# Altium PCB PCB.PcbDoc (part 1 of 3)
Units mm, origin at the board's own origin, x right, y up, seen from the top; angles counter-clockwise.
Board outline 68.58 x 53.34 mm, 4 copper layers (TOP, INNER1, INNER2, BOTTOM), stack 1.586 mm thick; 94 components, 161 nets, 536 pads, 304 vias.
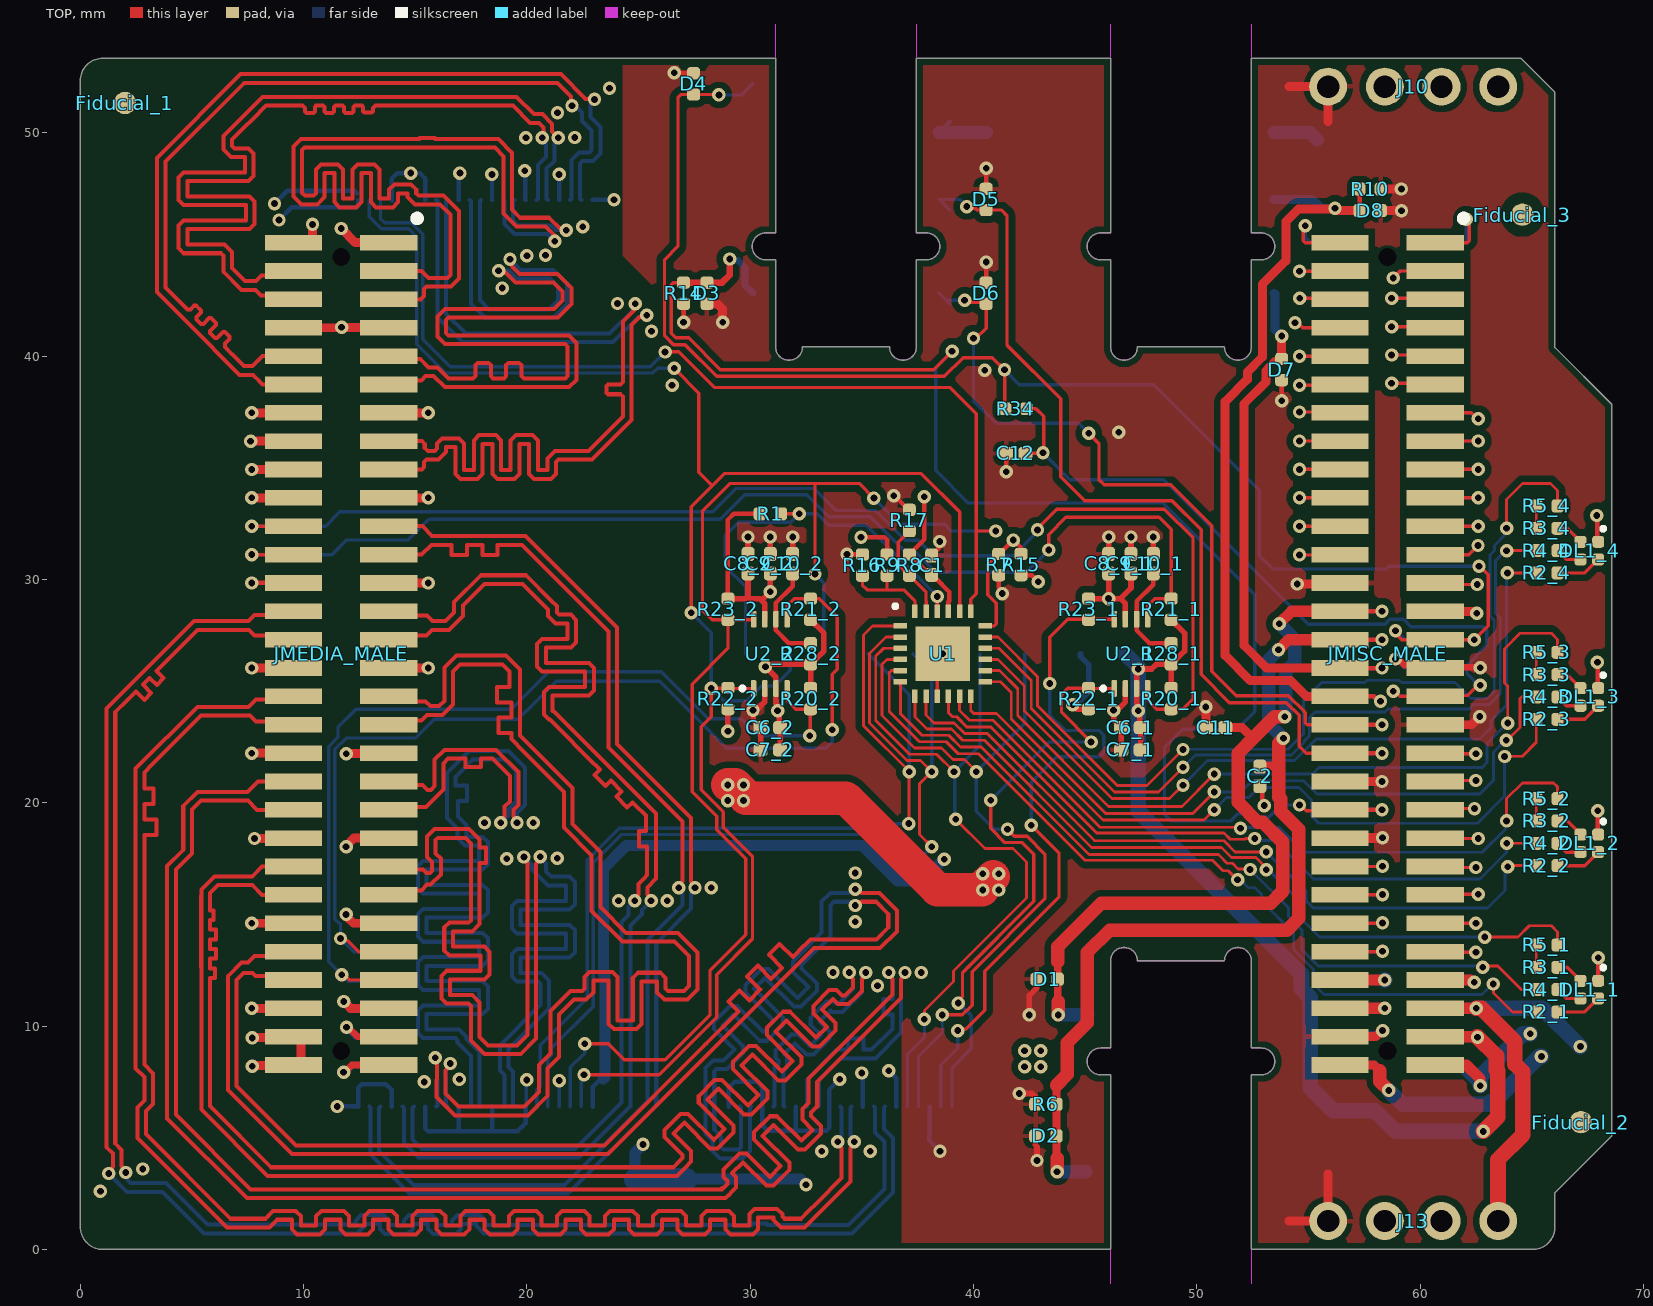
[diagram p0: TOP view]
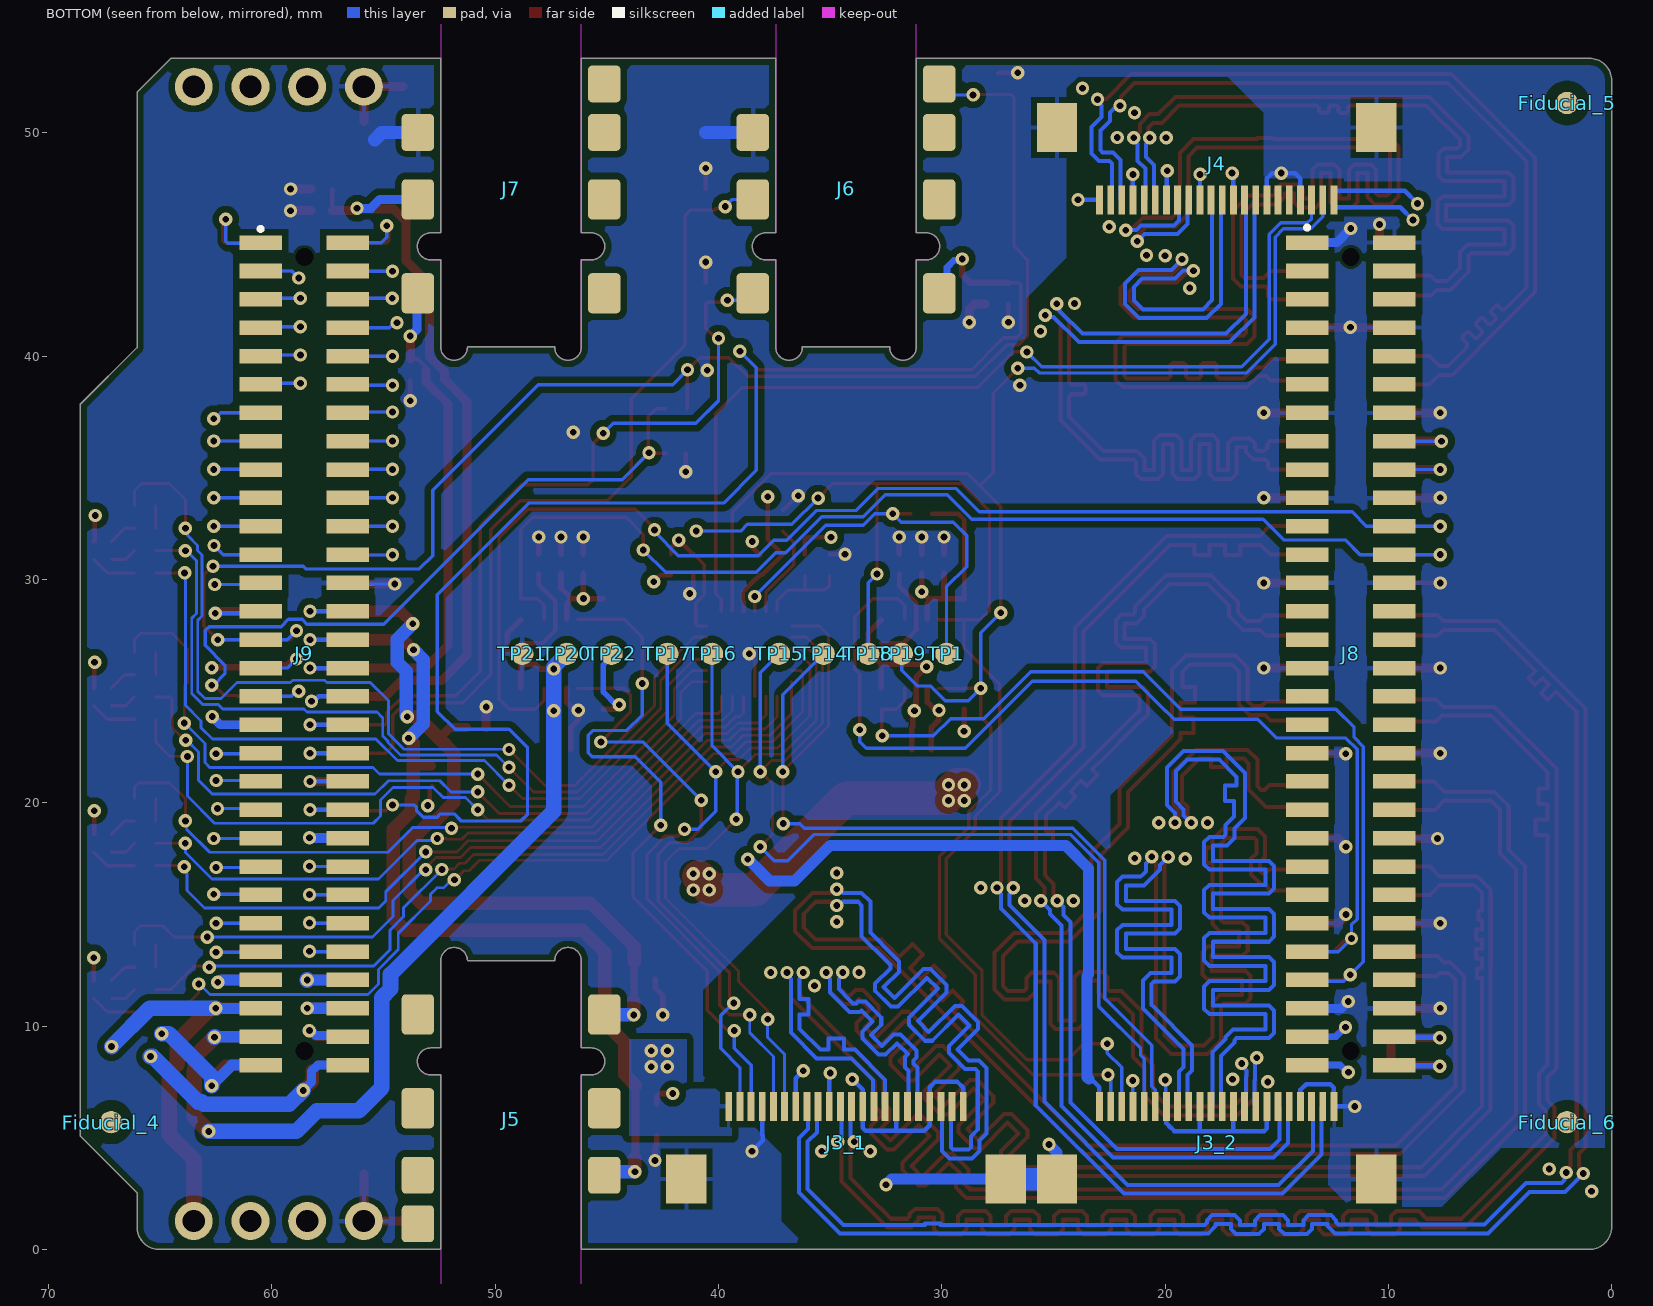
[diagram p1: BOTTOM view, seen from below]
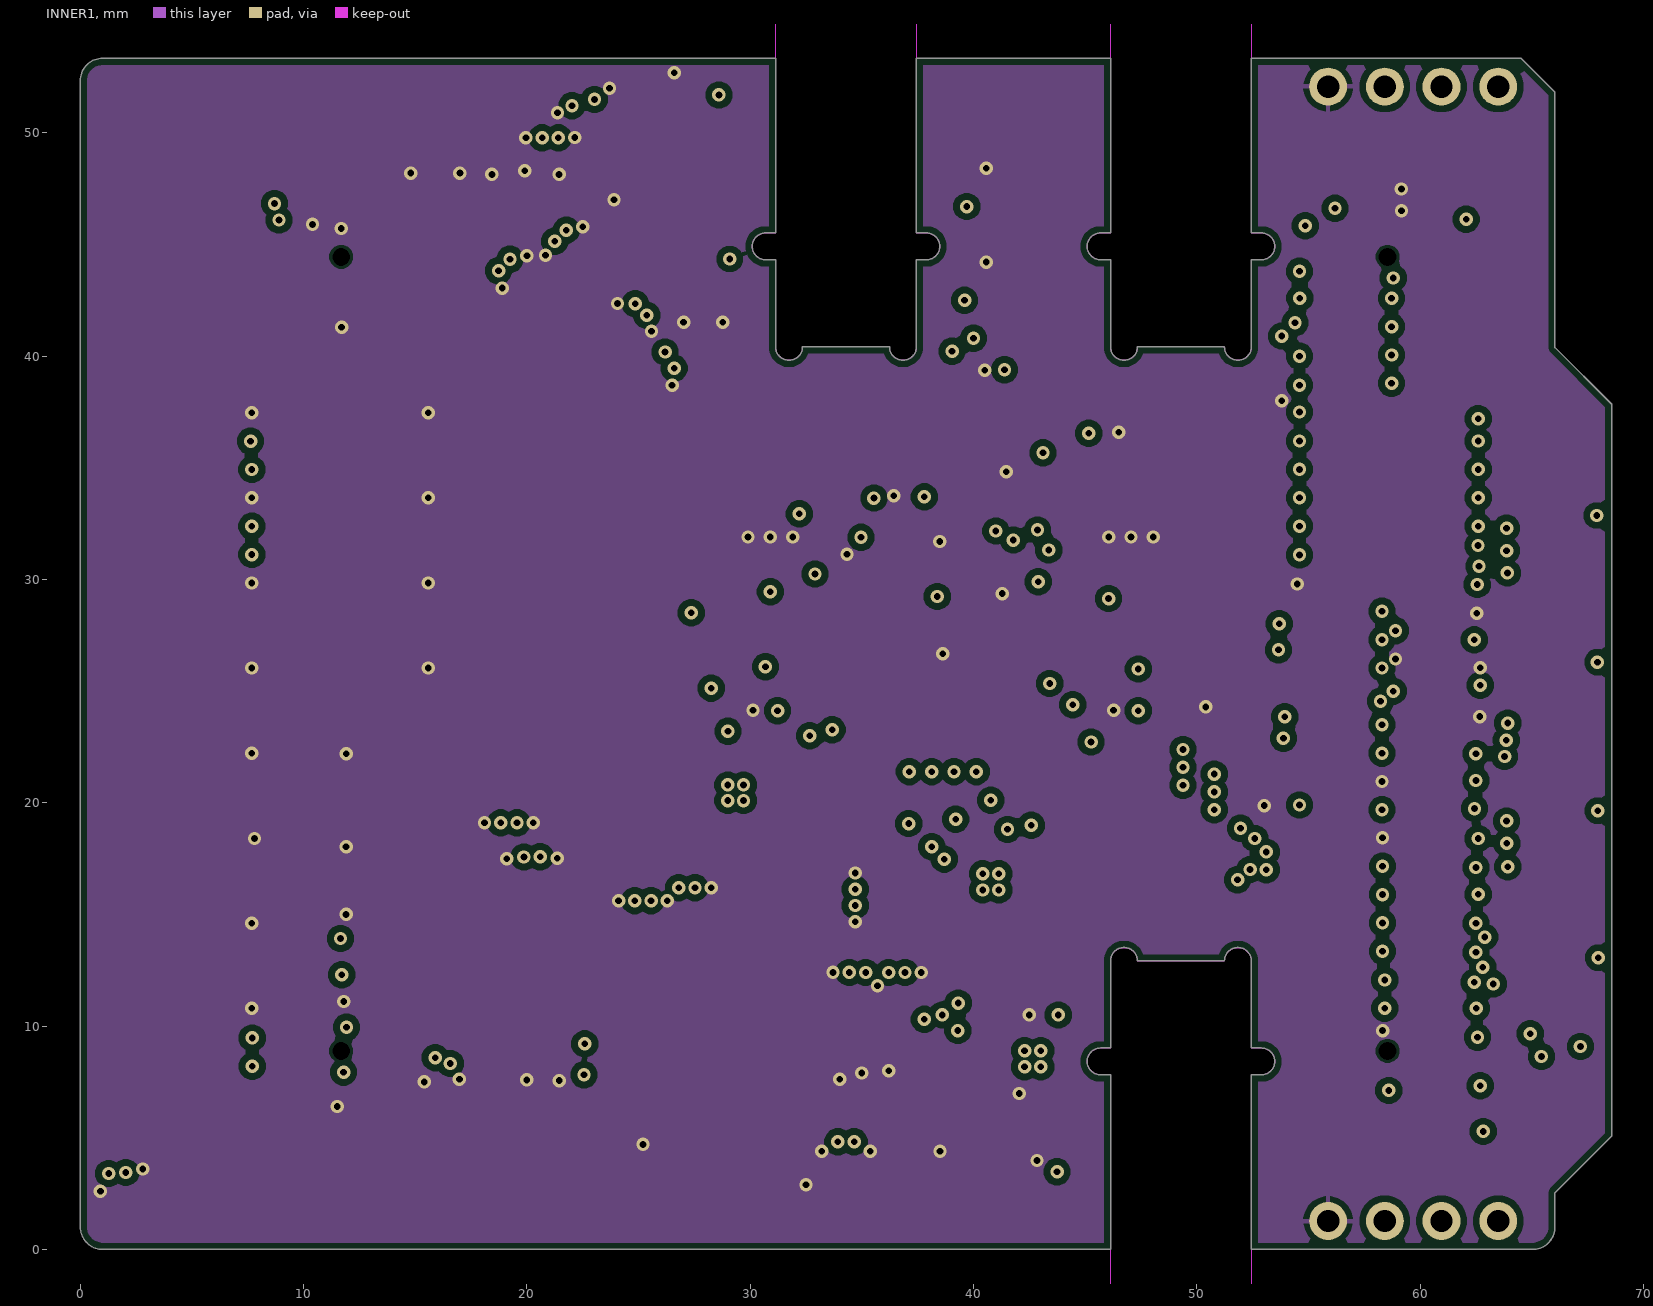
[diagram p2: INNER1]
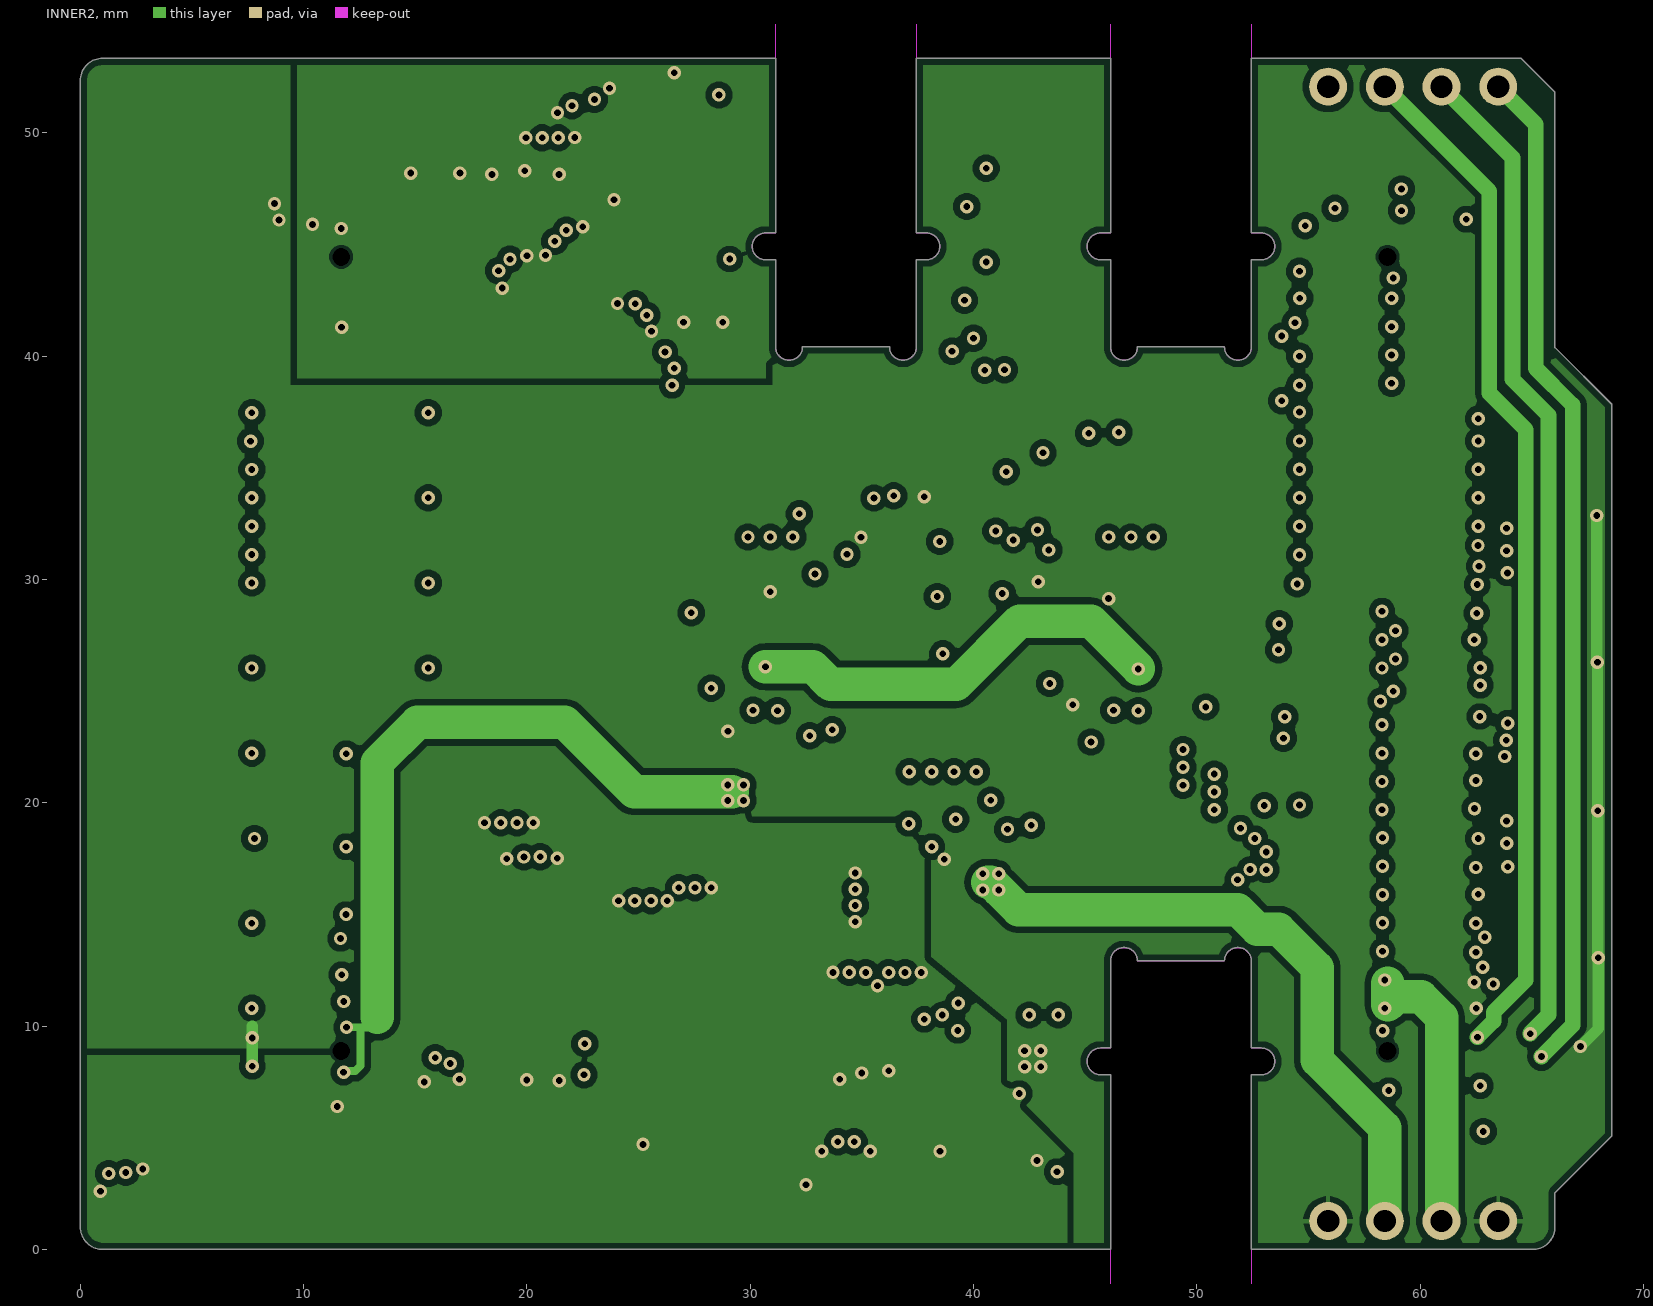
[diagram p3: INNER2]
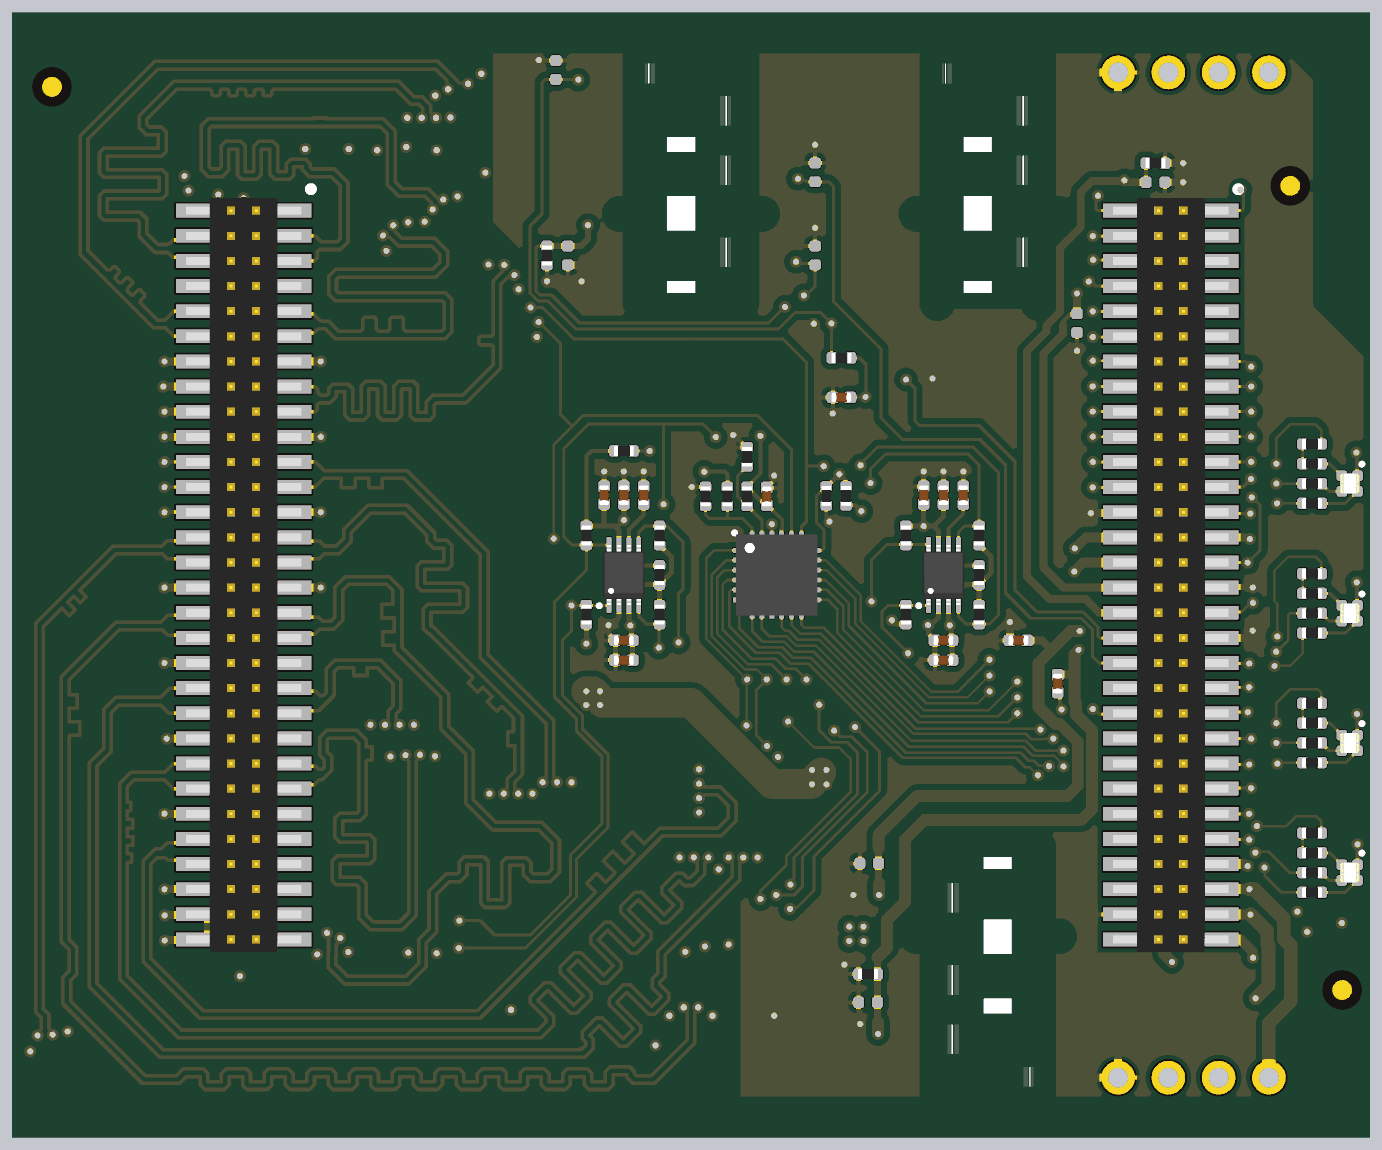
[diagram p6: 3D render of the assembled board from above, using the file's embedded part models]
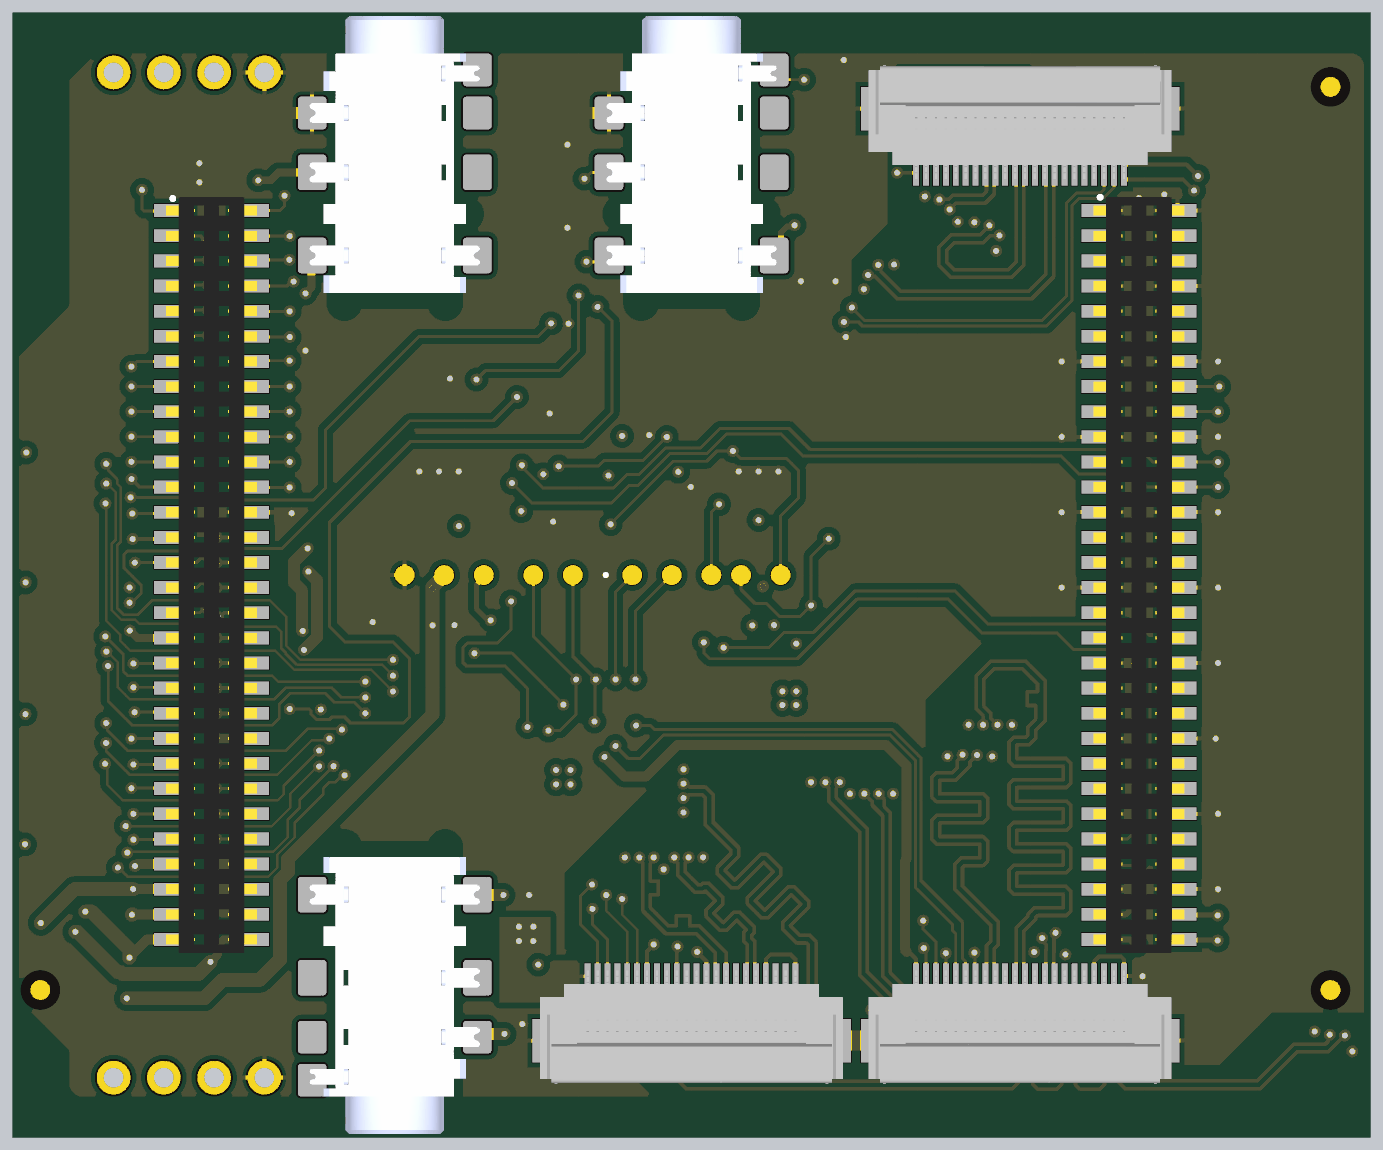
[diagram p7: 3D render of the assembled board from below, using the file's embedded part models]

## Layer stack, top to bottom
Top Solder: solder mask 0.0254, SM-003, Dk 4
TOP: signal copper 0.018
Dielectric 1: prepreg 0.14, PP-014, Dk 4.2
INNER1: signal copper 0.035
Dielectric2: core 1.2, FR-4, Dk 4.8
INNER2: signal copper 0.035
Dielectric3: prepreg 0.14, PP-014, Dk 4.2
BOTTOM: signal copper 0.018
Bottom Solder: solder mask 0.0254, SM-003, Dk 4

## Board outline
0,1 ccw(c1,1) 1,0 46.14,0 46.14,7.82 45.69,7.82 cw(c45.69,8.42) 45.69,9.02 46.14,9.02 46.14,12.92 cw(c46.74,12.92) 47.34,12.92 51.24,12.92 cw(c51.84,12.92) 52.44,12.92 52.44,9.02 52.89,9.02 cw(c52.89,8.42) 52.89,7.82 52.44,7.82 52.44,0 65.04,0 ccw(c65.04,1) 66.04,1 66.04,2.54 68.58,5.08 68.58,37.846 66.04,40.386 66.04,51.816 64.516,53.34 52.44,53.34 52.44,45.52 52.89,45.52 cw(c52.89,44.92) 52.89,44.32 52.44,44.32 52.44,40.42 cw(c51.84,40.42) 51.24,40.42 47.34,40.42 cw(c46.74,40.42) 46.14,40.42 46.14,44.32 45.69,44.32 cw(c45.69,44.92) 45.69,45.52 46.14,45.52 46.14,53.34 37.44,53.34 37.44,45.52 37.89,45.52 cw(c37.89,44.92) 37.89,44.32 37.44,44.32 37.44,40.42 cw(c36.84,40.42) 36.24,40.42 32.34,40.42 cw(c31.74,40.42) 31.14,40.42 31.14,44.32 30.69,44.32 cw(c30.69,44.92) 30.69,45.52 31.14,45.52 31.14,53.34 1,53.34 ccw(c1,52.34) 0,52.34

## Design rules (kind name [scope] priority, off if disabled: settings)
BoardOutlineClearance Silks [(OnLayer('Top Overlay') OR OnLayer('Bottom Overlay'))] p1: gap=0 ignorepadtopadclearanceinfootprint=FALSE
BoardOutlineClearance [All] p2: gap=0.3 ignorepadtopadclearanceinfootprint=FALSE
Clearance Clearance_differential_CSI0 [InDifferentialPair('CSI0_D0') OR InDifferentialPair('CSI0_D1') vs InNetClass('IMPEDANCE_100R')] p1: gap=0.127 ignorepadtopadclearanceinfootprint=FALSE
Clearance Clearance_differential [InNetClass('IMPEDANCE_100R') vs InNetClass('IMPEDANCE_100R')] p2: gap=0.4 ignorepadtopadclearanceinfootprint=FALSE
Clearance COPPER_0.3mm [All] p3: gap=0.127 ignorepadtopadclearanceinfootprint=FALSE except(0.3: Arc-Fill Arc-Poly Arc-Region Track-Fill Track-Poly Track-Region SMDPad-Fill SMDPad-Poly SMDPad-Region THPad-Fill THPad-Poly THPad-Region Via-Fill Via-Poly Via-Region Fill-Fill Fill-Poly Fill-Region Poly-Poly Poly-Region Region-Region)
Clearance "Generic clearance 0.127mm" [All] p4: gap=0.127 ignorepadtopadclearanceinfootprint=FALSE
ComponentClearance [All] p1: gap=0.2 collisioncheckmode=3 verticalgap=0 showdistances=TRUE
DiffPairsRouting DSI_diffpairrouting [InDifferentialPairClass('DSI')] p1: maxlimit=0.36 minlimit=0.21 mostfreqgap=0.36 toplayer_maxgap=0.21 toplayer_prefgap=0.21 toplayer_minwidth=0.18 toplayer_maxwidth=0.18 toplayer_prefwidth=0.18 bottomlayer_maxgap=0.21 bottomlayer_prefgap=0.21 bottomlayer_minwidth=0.18 bottomlayer_maxwidth=0.18 bottomlayer_prefwidth=0.18 impedanceprofiledriven=TRUE impedanceprofileid={F22B831B-72FA-4BC6-B015-EECE9AC290C8} impedanceprofilevalue=100.000000 maxuncoupledlength=12.7
DiffPairsRouting CSI0_diffpairrouting [InDifferentialPairClass('CSI0')] p2: maxlimit=0.36 minlimit=0.21 mostfreqgap=0.36 toplayer_maxgap=0.21 toplayer_prefgap=0.21 toplayer_minwidth=0.18 toplayer_maxwidth=0.18 toplayer_prefwidth=0.18 bottomlayer_maxgap=0.21 bottomlayer_prefgap=0.21 bottomlayer_minwidth=0.18 bottomlayer_maxwidth=0.18 bottomlayer_prefwidth=0.18 impedanceprofiledriven=TRUE impedanceprofileid={F22B831B-72FA-4BC6-B015-EECE9AC290C8} impedanceprofilevalue=100.000000 maxuncoupledlength=12.7
DiffPairsRouting CSI1_diffpairrouting [InDifferentialPairClass('CSI1')] p3: maxlimit=0.36 minlimit=0.21 mostfreqgap=0.36 toplayer_maxgap=0.21 toplayer_prefgap=0.21 toplayer_minwidth=0.18 toplayer_maxwidth=0.18 toplayer_prefwidth=0.18 bottomlayer_maxgap=0.21 bottomlayer_prefgap=0.21 bottomlayer_minwidth=0.18 bottomlayer_maxwidth=0.18 bottomlayer_prefwidth=0.18 impedanceprofiledriven=TRUE impedanceprofileid={F22B831B-72FA-4BC6-B015-EECE9AC290C8} impedanceprofilevalue=100.000000 maxuncoupledlength=12.7
Height [All] p1: minheight=0 maxheight=30 prefheight=12.7
HoleSize [All] p1: absolutevalues=TRUE maxlimit=30 minlimit=0.3 maxpercent=80.000 minpercent=20.000
HoleToHoleClearance [All] p1: gap=0.25 allowstackedmicrovias=FALSE
MatchedLengths DSI_delay_pairs [InDifferentialPairClass('DSI')] p1: tolerance=0.15 checknetsindiffpair=TRUE checkdiffpairvsdiffpair=FALSE checkxsignals=FALSE checkothers=FALSE
MatchedLengths CSI0_delay_pairs [InDifferentialPairClass('CSI0')] p2: tolerance=0.15 checknetsindiffpair=TRUE checkdiffpairvsdiffpair=FALSE checkxsignals=FALSE checkothers=FALSE
MatchedLengths CSI1_delay_pairs [InDifferentialPairClass('CSI1')] p3: tolerance=0.15 checknetsindiffpair=TRUE checkdiffpairvsdiffpair=FALSE checkxsignals=FALSE checkothers=FALSE
MatchedLengths DSI_delay_group [InDifferentialPairClass('DSI')] p4: tolerance=0.5 checknetsindiffpair=FALSE checkdiffpairvsdiffpair=TRUE checkxsignals=TRUE checkothers=TRUE
MatchedLengths CSI0_delay_group [InDifferentialPairClass('CSI0')] p5: tolerance=0.5 checknetsindiffpair=FALSE checkdiffpairvsdiffpair=TRUE checkxsignals=TRUE checkothers=TRUE
MatchedLengths CSI1_delay_group [InDifferentialPairClass('CSI1')] p6: tolerance=0.5 checknetsindiffpair=FALSE checkdiffpairvsdiffpair=TRUE checkxsignals=TRUE checkothers=TRUE
MinimumAnnularRing [All] p1: minimumring=0.15
PlaneConnect [All] p1: pad.planeconnectstyle=Relief pad.reliefexpansion=0.508 pad.reliefentries=4 pad.reliefconductorwidth=0.254 pad.reliefairgap=0.254 via.planeconnectstyle=Direct via.reliefexpansion=0.508 via.reliefentries=4 via.reliefconductorwidth=0.254 via.reliefairgap=0.254
PolygonConnect QR_POLY [(ObjectKind = 'Pad') And (Name = 'QR1-PAD')] p1: connectstyle=Direct reliefconductorwidth=0.254 reliefentries=4 polygonreliefangle="90 Angle" airgapwidth=0.254
PolygonConnect [All] p2: thpad.connectstyle=Relief thpad.reliefconductorwidth=0.2 thpad.reliefentries=4 thpad.polygonreliefangle="90 Angle" thpad.airgapwidth=0.254 smdpad.connectstyle=Relief smdpad.reliefconductorwidth=0.2 smdpad.reliefentries=4 smdpad.polygonreliefangle="90 Angle" smdpad.airgapwidth=0.254 via.connectstyle=Direct via.reliefconductorwidth=0.254 via.reliefentries=4 via.polygonreliefangle="90 Angle" via.airgapwidth=0.254
ReturnPath ReturnPath_100R [InNetClass('IMPEDANCE_100R')] p1: impedanceprofileid={F22B831B-72FA-4BC6-B015-EECE9AC290C8} _gaplimit=0.2 _useantipads=TRUE maxstitchviadistance=1.5
RoutingVias StandardVias [All] p1: holewidth=0.3 width=0.6 viastyle="Through Hole" minholewidth=0.3 minwidth=0.6 maxholewidth=0.3 maxwidth=0.6
SMDToCorner [All] p1: distance=39370
SilkToSilkClearance [All] p1: silktosilkclearance=0.2
SilkToSolderMaskClearance [IsPad] p1: minsilkscreentomaskgap=0.15 clearancetoexposedcopper=TRUE
SolderMaskExpansion VIAtented [IsVia] p1: expansion=0.102 istentingtop=TRUE
SolderMaskExpansion [All] p2: expansion=0.05 istentingtop=FALSE
SupplyNets "Schematic Supply Nets_2" [InNet('GND')] p1: voltage=0.000
SupplyNets "Schematic Supply Nets_4" [InNet('+5V')] p2: voltage=0.000
SupplyNets "Schematic Supply Nets_6" [InNet('PWR_3P3V')] p3: voltage=0.000
SupplyNets "Schematic Supply Nets_1" [InNet('DC_IN')] p4: voltage=0.000
SupplyNets "Schematic Supply Nets" [InNet('VCC_PX3_1P8')] p5: voltage=0.000
SupplyNets "Schematic Supply Nets_7" [InNet('VCOIN')] p6: voltage=0.000
SupplyNets "Schematic Supply Nets_3" [InNet('VBAT')] p7: voltage=0.000
UnConnectedPin [All] p1:
UnRoutedNet [All] p1: checkbadconnections=TRUE
ViasUnderSMD ViasUnderSMD_U1 [InComponent('U1')] p1: allowed=TRUE
ViasUnderSMD ViasUnderSMD_JMISC [InComponent('JMEDIA_MALE')] p2: allowed=TRUE
ViasUnderSMD [All] p3: allowed=FALSE
Width StandardTraces [All] p1: maxlimit=5 minlimit=0.127 preferedwidth=0.15
21 further rules are at their usual default settings.

## Classes and differential pairs
channel class LED_RGB: U_LED_RGB_1 U_LED_RGB_2 U_LED_RGB_3 U_LED_RGB_4
component class U_LED_RGB_1: DL1_1 R2_1 R3_1 R4_1 R5_1
component class U_LED_RGB_3: DL1_3 R2_3 R3_3 R4_3 R5_3
component class U_LED_RGB_2: DL1_2 R2_2 R3_2 R4_2 R5_2
component class U_LED_RGB_4: DL1_4 R2_4 R3_4 R4_4 R5_4
channel class CSI_FLAT: U_FLAT_CSI1 U_FLAT_CSI2
component class U_HEADERS_IMOLA_MALE: JMEDIA_MALE JMISC_MALE
component class U_Sheet1: C1 R1 R7 R8 R9 R15 R16 R17 TP1 U1
component class U_AUDIO_LINEOUT: D7 D8 J7 R10
component class U_AUDIO_HEADPHONES_MIC: C12 D3 D4 D5 D6 J6 R14 R34
component class U_AUDIO_EAR: C2 C11 D1 D2 J5 R6
component class U_DSI_FLAT: J4
differential pair class DSI: DSI_CLK DSI_D0 DSI_D1 DSI_D2 DSI_D3
channel class TRANSLATOR_I2C: U_TRANSLATOR_I2C1 U_TRANSLATOR_I2C2
component class U_TRANSLATOR_I2C1: C6_1 C7_1 C8_1 C9_1 C10_1 R20_1 R21_1 R22_1 R23_1 R28_1 U2_1
component class U_TRANSLATOR_I2C2: C6_2 C7_2 C8_2 C9_2 C10_2 R20_2 R21_2 R22_2 R23_2 R28_2 U2_2
component class U_FLAT_CSI2: J3_2
component class U_FLAT_CSI1: J3_1
net class I2C: GPIO_22 GPIO_23 GPIO_29 GPIO_30 NetJ3_1_20 NetJ3_1_21 NetJ3_2_20 NetJ3_2_21
differential pair class CSI0: CSI0_CK CSI0_D0 CSI0_D1 CSI0_D2 CSI0_D3
differential pair class CSI1: CSI1_CK CSI1_D0 CSI1_D1 CSI1_D2 CSI1_D3
net class IMPEDANCE_100R: CSI0_CK_N CSI0_CK_P CSI0_D0_N CSI0_D0_P CSI0_D1_N CSI0_D1_P CSI0_D2_N CSI0_D2_P CSI0_D3_N CSI0_D3_P CSI1_CK_N CSI1_CK_P CSI1_D0_N CSI1_D0_P CSI1_D1_N CSI1_D1_P CSI1_D2_N CSI1_D2_P CSI1_D3_N CSI1_D3_P DSI_CLK_N DSI_CLK_P DSI_D0_N DSI_D0_P DSI_D1_N DSI_D1_P DSI_D2_N DSI_D2_P DSI_D3_N DSI_D3_P
component class U_HEADERS_IMOLA_FEMALE: J8 J9
component class TOP: Fiducial_1 Fiducial_2 Fiducial_3 Fiducial_4 Fiducial_5 Fiducial_6 J10 J13 TP14 TP15 TP16 TP17 TP18 TP19 TP20 TP21 TP22
differential pair DSI_D1: +DSI_D1_P -DSI_D1_N
differential pair DSI_D0: +DSI_D0_P -DSI_D0_N
differential pair DSI_D3: +DSI_D3_P -DSI_D3_N
differential pair DSI_CLK: +DSI_CLK_P -DSI_CLK_N
differential pair DSI_D2: +DSI_D2_P -DSI_D2_N
differential pair CSI1_D3: +CSI1_D3_P -CSI1_D3_N
differential pair CSI1_D2: +CSI1_D2_P -CSI1_D2_N
differential pair CSI1_D1: +CSI1_D1_P -CSI1_D1_N
differential pair CSI1_D0: +CSI1_D0_P -CSI1_D0_N
differential pair CSI1_CK: +CSI1_CK_P -CSI1_CK_N
differential pair CSI0_D3: +CSI0_D3_P -CSI0_D3_N
differential pair CSI0_D2: +CSI0_D2_P -CSI0_D2_N
differential pair CSI0_D1: +CSI0_D1_P -CSI0_D1_N
differential pair CSI0_D0: +CSI0_D0_P -CSI0_D0_N
differential pair CSI0_CK: +CSI0_CK_P -CSI0_CK_N

## Components (designator, comment, footprint, x,y, rotation, side; value= is the part's Value field where it differs from the comment)
C1 "GRM155R61A104KA01J" CAP-0402 38.128,30.645 r270 top value=100nF
C2 "GRM155R61H104KE19D" CAP-0402 52.825,21.185 r90 top value=100nF
C6_1 "C1005A475M6R3NT" CAP-0402 47.053,23.37 r0 top value=4.7µF (schematic designator C6)
C6_2 "C1005A475M6R3NT" CAP-0402 30.903,23.37 r0 top value=4.7µF (schematic designator C6)
C7_1 "GRM155R61H104KE19D" CAP-0402 47.053,22.37 r180 top value=100nF (schematic designator C7)
C7_2 "GRM155R61H104KE19D" CAP-0402 30.903,22.37 r180 top value=100nF (schematic designator C7)
C8_1 "C1005A475M6R3NT" CAP-0402 46.053,30.705 r270 top value=4.7µF (schematic designator C8)
C8_2 "C1005A475M6R3NT" CAP-0402 29.903,30.705 r270 top value=4.7µF (schematic designator C8)
C9_1 "GRM155R61H104KE19D" CAP-0402 47.053,30.705 r90 top value=100nF (schematic designator C9)
C9_2 "GRM155R61H104KE19D" CAP-0402 30.903,30.705 r90 top value=100nF (schematic designator C9)
C10_1 "C1005A475M6R3NT" CAP-0402 48.053,30.705 r270 top value=4.7µF (schematic designator C10)
C10_2 "C1005A475M6R3NT" CAP-0402 31.903,30.705 r270 top value=4.7µF (schematic designator C10)
C11 "GRM155R61H104KE19D" CAP-0402 50.841,23.37 r0 top value=100nF
C12 "GRM155R61H104KE19D" CAP-0402 41.895,35.646 r0 top value=100nF
D1 "CG0402MLC-3.3LG" 0402 43.3,12.1 r0 top
D2 "CG0402MLC-3.3LG" 0402 43.243,5.08 r0 top
D3 "CG0402MLC-3.3LG" 0402 28.065,42.82 r90 top
D4 "CG0402MLC-3.3LG" 0402 27.465,52.195 r270 top
D5 "CG0402MLC-3.3LG" 0402 40.565,47.02 r270 top
D6 "CG0402MLC-3.3LG" 0402 40.565,42.82 r270 top
D7 "CG0402MLC-3.3LG" 0402 53.8,39.4 r90 top
D8 "CG0402MLC-3.3LG" 0402 57.765,46.52 r180 top
DL1_1 "LTST-C28NBEGK-2A" SMLP34RGB2W 67.58,11.633 r180 top (schematic designator DL1)
DL1_2 "LTST-C28NBEGK-2A" SMLP34RGB2W 67.58,18.187 r180 top (schematic designator DL1)
DL1_3 "LTST-C28NBEGK-2A" SMLP34RGB2W 67.58,24.739 r180 top (schematic designator DL1)
DL1_4 "LTST-C28NBEGK-2A" SMLP34RGB2W 67.58,31.293 r180 top (schematic designator DL1)
Fiducial_1 "Fiducial mark 1mm with 2mm solder" "Fiducial mark 1mm with circle-Footprint-1" 2,51.34 r180 top
Fiducial_2 "Fiducial mark 1mm with 2mm solder" "Fiducial mark 1mm with circle-Footprint-1" 67.2,5.7 r180 top
Fiducial_3 "Fiducial mark 1mm with 2mm solder" "Fiducial mark 1mm with circle-Footprint-1" 64.58,46.34 r180 top
Fiducial_4 "Fiducial mark 1mm with 2mm solder" "Fiducial mark 1mm with circle-Footprint-1" 67.2,5.7 r180 bottom
Fiducial_5 "Fiducial mark 1mm with 2mm solder" "Fiducial mark 1mm with circle-Footprint-1" 2,51.34 r180 bottom
Fiducial_6 "Fiducial mark 1mm with 2mm solder" "Fiducial mark 1mm with circle-Footprint-1" 2,5.7 r180 bottom
J3_1 "TF31-22S-0.5SH(800)" TF31-22S-0.5SH(800) 34.29,4.77 r180 bottom locked (schematic designator J3)
J3_2 "TF31-22S-0.5SH(800)" TF31-22S-0.5SH(800) 17.69,4.77 r180 bottom locked (schematic designator J3)
J4 "TF31-22S-0.5SH(800)" TF31-22S-0.5SH(800) 17.69,48.62 r0 bottom locked
J5 "SJ-43615TS-SMT-TR" SJ-43615TS-SMT-TR 49.29,6.62 r90 bottom
J6 "SJ-43615TS-SMT-TR" SJ-43615TS-SMT-TR 34.29,46.72 r270 bottom
J7 "SJ-43615TS-SMT-TR" SJ-43615TS-SMT-TR 49.29,46.72 r270 bottom
J8 "CSEC202-3002C004C1AF" CSEC202-3002C004C1AF 11.684,26.67 r270 bottom locked
J9 "CSEC202-3002C004C1AF" CSEC202-3002C004C1AF 58.547,26.67 r270 bottom locked
J10 "HEADER TH 2.54mm VERT. 1x004POS" "PIN HEADER 2.54mm VERT. 1x4POS-Footprint-1" 59.69,52.07 r180 top
J13 "HEADER TH 2.54mm VERT. 1x004POS" "PIN HEADER 2.54mm VERT. 1x4POS-Footprint-1" 59.69,1.27 r180 top
JMEDIA_MALE "GPEC212-3002A011C1AF" GPEC212-3002A011C1AF 11.684,26.67 r270 top locked
JMISC_MALE "GPEC212-3002A011C1AF" GPEC212-3002A011C1AF 58.547,26.67 r270 top locked
R1 "CRCW040210K0FKED" RES-0402 30.903,32.94 r180 top value=10k
R2_1 "RC0402FR-074K7L" RES-0402 65.68,10.633 r0 top value=4.7k (schematic designator R2)
R2_2 "RC0402FR-074K7L" RES-0402 65.68,17.187 r0 top value=4.7k (schematic designator R2)
R2_3 "RC0402FR-074K7L" RES-0402 65.68,23.739 r0 top value=4.7k (schematic designator R2)
R2_4 "RC0402FR-074K7L" RES-0402 65.68,30.293 r0 top value=4.7k (schematic designator R2)
R3_1 "RC0402FR-074K7L" RES-0402 65.68,12.633 r0 top value=4.7k (schematic designator R3)
R3_2 "RC0402FR-074K7L" RES-0402 65.68,19.187 r0 top value=4.7k (schematic designator R3)
R3_3 "RC0402FR-074K7L" RES-0402 65.68,25.739 r0 top value=4.7k (schematic designator R3)
R3_4 "RC0402FR-074K7L" RES-0402 65.68,32.293 r0 top value=4.7k (schematic designator R3)
R4_1 "RC0402FR-074K7L" RES-0402 65.68,11.633 r0 top value=4.7k (schematic designator R4)
R4_2 "RC0402FR-074K7L" RES-0402 65.68,18.187 r0 top value=4.7k (schematic designator R4)
R4_3 "RC0402FR-074K7L" RES-0402 65.68,24.739 r0 top value=4.7k (schematic designator R4)
R4_4 "RC0402FR-074K7L" RES-0402 65.68,31.293 r0 top value=4.7k (schematic designator R4)
R5_1 "CRCW040210K0FKED" RES-0402 65.68,13.633 r0 top value=10k (schematic designator R5)
R5_2 "CRCW040210K0FKED" RES-0402 65.68,20.187 r0 top value=10k (schematic designator R5)
R5_3 "CRCW040210K0FKED" RES-0402 65.68,26.739 r0 top value=10k (schematic designator R5)
R5_4 "CRCW040210K0FKED" RES-0402 65.68,33.293 r0 top value=10k (schematic designator R5)
R6 "CRCW04020000Z0EDC" RES-0402 43.243,6.5 r0 top value=0
R7 "CRCW04020000Z0EDC" RES-0402 41.128,30.67 r270 top value=0
R8 "CRCW04020000Z0EDC" RES-0402 37.128,30.645 r270 top value=0
R9 "CRCW04020000Z0EDC" RES-0402 36.128,30.645 r270 top value=0
R10 "CRCW04020000Z0EDC" RES-0402 57.764,47.485 r180 top value=0
R14 "CRCW040210K0FKED" RES-0402 27.015,42.82 r90 top value=10k
R15 "CRCW04020000Z0EDC" RES-0402 42.128,30.67 r90 top value=0
R16 "CRCW04020000Z0EDC" RES-0402 35.028,30.645 r90 top value=0
R17 "CRCW04020000Z0EDC" RES-0402 37.128,32.645 r90 top value=0
R20_1 "CRCW040210K0FKED" RES-0402 48.853,24.67 r90 top value=10k (schematic designator R20)
R20_2 "CRCW040210K0FKED" RES-0402 32.703,24.67 r90 top value=10k (schematic designator R20)
R21_1 "CRCW040210K0FKED" RES-0402 48.853,28.67 r270 top value=10k (schematic designator R21)
R21_2 "CRCW040210K0FKED" RES-0402 32.703,28.67 r270 top value=10k (schematic designator R21)
R22_1 "CRCW040210K0FKED" RES-0402 45.153,24.67 r270 top value=10k (schematic designator R22)
R22_2 "CRCW040210K0FKED" RES-0402 29.003,24.67 r270 top value=10k (schematic designator R22)
R23_1 "CRCW040210K0FKED" RES-0402 45.153,28.67 r90 top value=10k (schematic designator R23)
R23_2 "CRCW040210K0FKED" RES-0402 29.003,28.67 r90 top value=10k (schematic designator R23)
R28_1 "CRCW040210K0FKED" RES-0402 48.853,26.67 r270 top value=10k (schematic designator R28)
R28_2 "CRCW040210K0FKED" RES-0402 32.703,26.67 r270 top value=10k (schematic designator R28)
R34 "AF0402FR-072K2L" RES-0402 41.895,37.646 r180 top value=2.2k
TP1 "Test point 1.00mm" TP-1.00MM 29.79,26.67 r180 bottom
TP14 "Test point 1.00mm" TP-1.00MM 35.29,26.67 r180 bottom
TP15 "Test point 1.00mm" TP-1.00MM 37.29,26.67 r180 bottom
TP16 "Test point 1.00mm" TP-1.00MM 40.29,26.67 r180 bottom
TP17 "Test point 1.00mm" TP-1.00MM 42.29,26.67 r180 bottom
TP18 "Test point 1.00mm" TP-1.00MM 33.29,26.67 r180 bottom
TP19 "Test point 1.00mm" TP-1.00MM 31.79,26.67 r180 bottom
TP20 "Test point 1.00mm" TP-1.00MM 46.79,26.67 r180 bottom
TP21 "Test point 1.00mm" TP-1.00MM 48.79,26.67 r180 bottom
TP22 "Test point 1.00mm" TP-1.00MM 44.79,26.67 r180 bottom
U1 "TCA9555RGER" PQFN50P400X400X100_HS-25N 38.628,26.67 r0 top
U2_1 "TCA9406DCUR" "VSSOP8 pitch 0.5mm body 3.1x2x0.9mm" 47.053,26.67 r90 top (schematic designator U2)
U2_2 "TCA9406DCUR" "VSSOP8 pitch 0.5mm body 3.1x2x0.9mm" 30.903,26.67 r90 top (schematic designator U2)

## Footprints (in the part's own frame and the unit in brackets; to place one, negate y for a bottom-side part, rotate by r counter-clockwise, add the part's x,y. Pads: shape width x height; smd on the part's side, far side on the other; paste and mask are expansions set on the pad)
0402 [mm] "Chip Resistor, 2-Leads, Body  0402 (in) 1005 (mm), IPC Medium Density"
  rrect51% 0.55x0.58 smd mask+0.05: A(-0.475,0) C(0.475,0)
  body extent -0.53,-0.28 0.53,0.28, height 0.25
CAP-0402 [mm] "Chip Capacitor, 2-Leads, Body  0402 (in) 1005 (mm), IPC Medium Density"
  rrect52% 0.63x0.58 smd mask+0.05: 1(-0.435,0) 2(0.435,0)
  body extent -0.5,-0.25 0.5,0.25, height 0.5
CSEC202-3002C004C1AF [mm]
  rect 0.65x1.9 smd: 1(-18.415,-1.95) 2(-18.415,1.95) 3(-17.145,-1.95) 4(-17.145,1.95) 5(-15.875,-1.95) 6(-15.875,1.95) 7(-14.605,-1.95) 8(-14.605,1.95) 9(-13.335,-1.95) 10(-13.335,1.95) 11(-12.065,-1.95) 12(-12.065,1.95) 13(-10.795,-1.95) 14(-10.795,1.95) 15(-9.525,-1.95) 16(-9.525,1.95) 17(-8.255,-1.95) 18(-8.255,1.95) 19(-6.985,-1.95) 20(-6.985,1.95) 21(-5.715,-1.95) 22(-5.715,1.95) 23(-4.445,-1.95) 24(-4.445,1.95) 25(-3.175,-1.95) 26(-3.175,1.95) 27(-1.905,-1.95) 28(-1.905,1.95) 29(-0.635,-1.95) 30(-0.635,1.95) 31(0.635,-1.95) 32(0.635,1.95) 33(1.905,-1.95) 34(1.905,1.95) 35(3.175,-1.95) 36(3.175,1.95) 37(4.445,-1.95) 38(4.445,1.95) 39(5.715,-1.95) 40(5.715,1.95) 41(6.985,-1.95) 42(6.985,1.95) 43(8.255,-1.95) 44(8.255,1.95) 45(9.525,-1.95) 46(9.525,1.95) 47(10.795,-1.95) 48(10.795,1.95) 49(12.065,-1.95) 50(12.065,1.95) 51(13.335,-1.95) 52(13.335,1.95) 53(14.605,-1.95) 54(14.605,1.95) 55(15.875,-1.95) 56(15.875,1.95) 57(17.145,-1.95) 58(17.145,1.95) 59(18.415,-1.95) 60(18.415,1.95)
  round 0.6 hole 0.8 unplated mask+0.2: FIXING_PLASTIC_PIN(-17.78,0) FIXING_PLASTIC_PIN(17.78,0)
  silkscreen extent -19.14,-2.01 -19.04,-1.91, body extent -19.11,-2.3 19.11,2.3, height 4.55
"Fiducial mark 1mm with circle-Footprint-1" [mm]
  round 1 smd paste-10 mask+0.5: 1(0,0)
  TOP pour cut-out: 0,1 0.383,0.924 0.707,0.707 0.924,0.383 1,0 1,0 0.924,-0.383 0.707,-0.707 0.383,-0.924 0,-1 0,-1 -0.383,-0.924 -0.707,-0.707 -0.924,-0.383 -1,0 -1,0 -0.924,0.383 -0.707,0.707 -0.383,0.924 0,1
GPEC212-3002A011C1AF [mm]
  rect 0.7x2.57 smd mask+0.1: 1(-18.415,2.135) 2(-18.415,-2.135) 3(-17.145,2.135) 4(-17.145,-2.135) 5(-15.875,2.135) 6(-15.875,-2.135) 7(-14.605,2.135) 8(-14.605,-2.135) 9(-13.335,2.135) 10(-13.335,-2.135) 11(-12.065,2.135) 12(-12.065,-2.135) 13(-10.795,2.135) 14(-10.795,-2.135) 15(-9.525,2.135) 16(-9.525,-2.135) 17(-8.255,2.135) 18(-8.255,-2.135) 19(-6.985,2.135) 20(-6.985,-2.135) 21(-5.715,2.135) 22(-5.715,-2.135) 23(-4.445,2.135) 24(-4.445,-2.135) 25(-3.175,2.135) 26(-3.175,-2.135) 27(-1.905,2.135) 28(-1.905,-2.135) 29(-0.635,2.135) 30(-0.635,-2.135) 31(0.635,2.135) 32(0.635,-2.135) 33(1.905,2.135) 34(1.905,-2.135) 35(3.175,2.135) 36(3.175,-2.135) 37(4.445,2.135) 38(4.445,-2.135) 39(5.715,2.135) 40(5.715,-2.135) 41(6.985,2.135) 42(6.985,-2.135) 43(8.255,2.135) 44(8.255,-2.135) 45(9.525,2.135) 46(9.525,-2.135) 47(10.795,2.135) 48(10.795,-2.135) 49(12.065,2.135) 50(12.065,-2.135) 51(13.335,2.135) 52(13.335,-2.135) 53(14.605,2.135) 54(14.605,-2.135) 55(15.875,2.135) 56(15.875,-2.135) 57(17.145,2.135) 58(17.145,-2.135) 59(18.415,2.135) 60(18.415,-2.135)
  silkscreen extent -19.55,3.35 -19.45,3.45, body extent -19.05,-2.92 19.05,2.92, height 5.97
"PIN HEADER 2.54mm VERT. 1x4POS-Footprint-1" [mm]
  round 1.7 hole 1 mask+0.1: 1(-3.81,0) 2(-1.27,0) 3(1.27,0) 4(3.81,0)
PQFN50P400X400X100_HS-25N [mm] "PQFN, 24-Leads, Body 4,00x4,00mm, Pitch 0,50mm, Thermal Pad 2,45x2,45mm, IPC Medium Density"
  rect 0.6x0.25 smd mask+0.05: 1(-1.9,1.25) 2(-1.9,0.75) 3(-1.9,0.25) 4(-1.9,-0.25) 5(-1.9,-0.75) 6(-1.9,-1.25) 13(1.9,-1.25) 14(1.9,-0.75) 15(1.9,-0.25) 16(1.9,0.25) 17(1.9,0.75) 18(1.9,1.25)
  rect 0.25x0.6 smd mask+0.05: 7(-1.25,-1.9) 8(-0.75,-1.9) 9(-0.25,-1.9) 10(0.25,-1.9) 11(0.75,-1.9) 12(1.25,-1.9) 19(1.25,1.9) 20(0.75,1.9) 21(0.25,1.9) 22(-0.25,1.9) 23(-0.75,1.9) 24(-1.25,1.9)
  rect 2.45x2.45 smd paste-10 mask+0.05: 25(0,0)
  silkscreen extent -2.18,2.08 -2.08,2.18, body extent -2.05,-2.05 2.05,2.05, height 1
RES-0402 [mm] "Chip Resistor, 2-Leads, Body  0402 (in) 1005 (mm), IPC Medium Density"
  rrect51% 0.55x0.58 smd mask+0.05: 1(-0.475,0) 2(0.475,0)
  body extent -0.5,-0.25 0.5,0.25, height 0.34
SJ-43615TS-SMT-TR [mm]
  rrect25% 1.65x1.45 smd mask+0.1: 1(-5.475,4.175) 4(-3.3,-4.175) 12(-3.3,4.175)
  rrect25% 1.8x1.45 smd mask+0.1: 2(3.9,-4.175) 3(-0.3,-4.175) 10(3.9,4.175) 11(-0.3,4.175)
  Keep-Out Layer board cut-out: 1.2,-3.15 1.2,-3.6 1.259,-3.86 1.426,-4.069 1.666,-4.185 1.934,-4.185 2.174,-4.069 2.341,-3.86 2.4,-3.6 2.4,-3.6 2.4,-3.15 6.3,-3.15 6.56,-3.091 6.769,-2.924 6.885,-2.684 6.885,-2.416 6.769,-2.176 6.56,-2.009 6.3,-1.95 6.3,-1.95 6.3,1.95 6.56,2.009 6.769,2.176 6.885,2.416 6.885,2.684 6.769,2.924 6.56,3.091 6.3,3.15 6.3,3.15 2.4,3.15 2.4,3.6 2.341,3.86 2.174,4.069 1.934,4.185 1.666,4.185 1.426,4.069 1.259,3.86 1.2,3.6 1.2,3.6 1.2,3.15 -8.35,3.15 -8.35,-3.15
  body extent -8.2,-4.3 5.8,4.3, height 3.9
SMLP34RGB2W [mm]
  rrect52% 0.54x0.54 smd mask+0.05: 1(-0.395,-0.395) 2(-0.395,0.395) 3(0.395,0.395) 4(0.395,-0.395)
  silkscreen extent -0.67,-1.04 -0.57,-0.94, body extent -0.5,-0.5 0.5,0.5, height 0.2
TF31-22S-0.5SH(800) [mm]
  rect 0.3x1.3 smd mask+0.05: 1(5.25,1.625) 2(4.75,1.625) 3(4.25,1.625) 4(3.75,1.625) 5(3.25,1.625) 6(2.75,1.625) 7(2.25,1.625) 8(1.75,1.625) 9(1.25,1.625) 10(0.75,1.625) 11(0.25,1.625) 12(-0.25,1.625) 13(-0.75,1.625) 14(-1.25,1.625) 15(-1.75,1.625) 16(-2.25,1.625) 17(-2.75,1.625) 18(-3.25,1.625) 19(-3.75,1.625) 20(-4.25,1.625) 21(-4.75,1.625) 22(-5.25,1.625)
  rect 1.8x2.2 smd mask+0.05: FIX(-7.15,-1.625) FIX(7.15,-1.625)
  body extent -7.65,-3.83 7.65,1.92, height 2
TP-1.00MM [mm]
  rrect100% 1x1 smd paste-2.54: X(0,0)
"VSSOP8 pitch 0.5mm body 3.1x2x0.9mm" [mm] "TSSOP, 8-Leads, Body 2.00x2.30mm, Pitch 0.50mm, IPC High Density"
  rrect50% 0.75x0.25 smd mask+0.05: 1(-1.55,0.75) 2(-1.55,0.25) 3(-1.55,-0.25) 4(-1.55,-0.75) 5(1.55,-0.75) 6(1.55,-0.25) 7(1.55,0.25) 8(1.55,0.75)
  silkscreen extent -1.6,1.2 -1.5,1.3, body extent -1.55,-1.05 1.55,1.05, height 0.9

## Part data
C1: library part C0134-A.4, "CAP CHIP 0402 100nF 10% 10V X5R", Case Code (Imperial)=0402, Dielectric=X5R, Manufacturer=Murata, Manufacturer 2=Walsin, Tolerance=10%, Voltage=10V, Code Arduino=C0134, Part Number=GRM155R61A104KA01J, Technology=Ceramic
C2 C7_1 C7_2 C9_1 C9_2 C11 C12: library part C0015-A.14, "CAP CHIP 0402 100nF 10% 50V X5R", Case Code (Imperial)=0402, Dielectric=X5R, Manufacturer=Murata, Tolerance=10%, Voltage=50V, Code Arduino=A5141, Part Number=GRM155R61H104KE19D, Technology=Ceramic
C6_1 C6_2 C8_1 C8_2 C10_1 C10_2: library part C0037-A.14, "CAP CHIP 0402 4.7uF 20% 6V3 X5R", Case Code (Imperial)=0402, Dielectric=X5R, Manufacturer=Hottech, Manufacturer 2="Samsung Electro-Mechanics", Manufacturer 3="Murata Electronics", Part number 2=CL05A475KQ5NRNC, Part number 3=GRM155R60J475ME47D, Tolerance=20%, Voltage=6.3V, Code Arduino=0833, Part Number=C1005A475M6R3NT, Technology=Ceramic
D1 D2 D3 D4 D5 D6 D7 D8: library part D0073-A.3, "DIODE TVS SMD 0402 3.3V ESD PROTECTION", Manufacturer=Bourns, Code Arduino=D0073, Datasheet=https://www.mouser.it/datasheet/2/54/MLC-777442.pdf, Device Type="ESD protection", Direction=Bidirectional, Part Number=CG0402MLC-3.3LG
DL1_1 DL1_2 DL1_3 DL1_4: library part L0014-A.13, "LED RGB DIFFUSED PICOLED SMD", Case Code (Imperial)=0404, Color=Blue,Green,Red, Forward Current=20mA, Forward Voltage=3V, Lens Color=White, Manufacturer=Liteon, Max Operating Temperature=85°C, Min Operating Temperature=-40°C, Test Current=5mA, Code Arduino=A5469, Dominant Wavelength=470nm, Height=0.25mm, Length=1mm, Lens Style=Rectangular, Lens Transparency=Diffused, Luminous Intensity=45mcd, Part Number=LTST-C28NBEGK-2A, Pin Count=4, Width=1mm
Fiducial_1 Fiducial_2 Fiducial_3 Fiducial_4 Fiducial_5 Fiducial_6: library part UT0024-A.6
J3_1 J3_2 J4: library part J0553-A.2, "CONN FFC/FPC Connector, 22 Contact(s), 1 Row(s), BOTTOM CONTACT, Female, Right Angle, 0.5mm Pitch", Manufacturer=Hirose, Code Arduino=J0553, Part Number=TF31-22S-0.5SH(800)
J5 J6 J7: library part J0533-A.9, "CONN Audio Jack 3.5mm, 4 conductor, tip switch, SMD mid mount", Manufacturer="Same Sky", Code Arduino=J0533, Part Number=SJ-43615TS-SMT-TR
J8 J9: library part J0575-A.2, "CONN HEADER FEMALE VERTICAL SMD 1.27mm 2x30 POS heigth 4.6mm FIXING PINS", Manufacturer=Greenconn, Code Arduino=J0575, Part Number=CSEC202-3002C004C1AF
J10 J13: library part J0162-A.6, Code Arduino=J0162
JMEDIA_MALE JMISC_MALE: library part J0568-A.3, "CONN HEADER MALE VERTICAL SMD 1.27mm 2x30 POS lead heigth 3.5mm", Manufacturer=Greenconn, Code Arduino=J0568, Part Number=GPEC212-3002A011C1AF
R1 R5_1 R5_2 R5_3 R5_4 R14 R20_1 R20_2 R21_1 R21_2 R22_1 R22_2 R23_1 R23_2 R28_1 R28_2: library part R0003-A.24, "RES CHIP 0402 10k 1% 1/16W", Case Code (Imperial)=0402, Manufacturer=Vishay, Power=62.5mW, Temperature Coefficient=100ppm, Tolerance=1%, Code Arduino=0136, Part Number=CRCW040210K0FKED, Technology="Thick film"
R2_1 R2_2 R2_3 R2_4 R3_1 R3_2 R3_3 R3_4 R4_1 R4_2 R4_3 R4_4: library part R0013-A.24, "RES CHIP 0402 4k7 1% 1/16W", Case Code (Imperial)=0402, Manufacturer=YAGEO, Power=62.5mW, Temperature Coefficient=200ppm, Tolerance=1%, Code Arduino=2196, Part Number=RC0402FR-074K7L, Technology="Thick film"
R6 R7 R8 R9 R10 R15 R16 R17: library part R0000-A.24, "RES CHIP 0402 0R 1/16W", Case Code (Imperial)=0402, Manufacturer=Vishay, Power=62.5mW, Temperature Coefficient=0ppm, Tolerance=0%, Code Arduino=0039, Part Number=CRCW04020000Z0EDC, Technology="Thick film"
R34: library part R0286-A.3, "RES CHIP 0402 2k2 1% 1/16W", Case Code (Imperial)=0402, Manufacturer=Yageo, Manufacturer 2=Hottech, Part number 2=RI0402L2201FT, Power=62.5mW, Temperature Coefficient=100ppm, Tolerance=1%, Code Arduino=R0286, Part Number=AF0402FR-072K2L, Technology="Thick film"
TP1 TP14 TP15 TP16 TP17 TP18 TP19 TP20 TP21 TP22: library part UT0013-A.6, Manufacturer="This is not a component", Code Arduino="This is not a component", Design Item ID=CMP-018-0005-A.3, Part Number="This is not a component", Pin Count=1, Source=ut.SchLib
U1: library part U0167-A.6, "IC 16b I2C EXPANDER with INTERRUPT", LCSC Part #=C2869248, Manufacturer="Texas Instruments", Code Arduino=U0167, Part Number=TCA9555RGER
U2_1 U2_2: library part U0087-A.10, "IC Translator 2b,  Push pull, OE, VCCA 1.65V to 3.6V, VCCB 2.3V to 5.5V, internal 10k pullups, Iq 2uA when VCCA or VCCB at 0V, VSSOP8 3.1x2x0.9mm", LCSC Part #=C840107, Manufacturer="Texas Instruments", Code Arduino=A5381, Part Number=TCA9406DCUR

## Via types
v1: diameter 0.6, hole 0.3, TOP to BOTTOM, tented both sides, 304 vias

## Nets (pads, with @x,y where several pads share a name; then routed paths per layer and width w, separated by ;. In a path a pad name is that pad's centre, name@x,y a point inside that pad or via, vN(x,y) a via of type N, cw(c..) or ccw(c..) an arc to the next point about the centre after c; other vN are vias at no path point)
+5V: J9.54 J9.56 J13.2 JMISC_MALE.54 JMISC_MALE.56 | length 19.6
  TOP w0.5: JMISC_MALE.56@56.747,10.795 v1(58.413,10.795) ; JMISC_MALE.54@56.747,12.065 v1(58.413,12.065)
  INNER2 w1.5: v1@58.559,11.919 58.559,10.951 58.912,11.305 60.051,11.305 60.96,10.396 J13.2@60.96,1.27
  BOTTOM w0.5: J9.56@56.805,10.795 v1(58.413,10.795) ; J9.54@56.805,12.065 v1(58.413,12.065)
CSI0_CK_N: J3_2.8 JMEDIA_MALE.33 | length 52.7
  TOP w0.18: JMEDIA_MALE.33@13.819,24.765 14.039,24.545 15.455,24.545 15.675,24.325 16.068,24.325 16.3,24.557 16.3,26.052 16.838,26.59 19.062,26.59 19.69,25.962 19.69,23.01 22.047,20.653 22.047,19.048 23.29,17.805 23.29,15.323 24.437,14.176 26.765,14.176 27.648,13.293 27.648,11.637 27.192,11.181 27.031,11.181 26.826,11.181 26.152,11.181 25.818,11.515 25.818,11.999 25.13,11.999 25.13,10.097 24.902,9.868 23.891,9.868 23.662,10.097 23.662,12.04 22.974,12.04 22.974,11.515 22.64,11.181 22.274,11.181 22.105,11.181 21.442,10.517 21.442,8.616 20.925,8.099 20.925,6.88 20.05,6.005 16.778,6.005 15.956,6.828 15.956,7.591 15.974,7.61 15.974,8.507 v1(15.894,8.588)
  BOTTOM w0.18: v1(15.894,8.588) 15.974,8.507 15.974,7.593 15.995,7.572 15.995,6.45 J3_2.8@15.94,6.395
CSI0_CK_P: J3_2.9 JMEDIA_MALE.35 | length 52.6
  TOP w0.18: JMEDIA_MALE.35@13.819,23.495 14.002,23.678 15.269,23.678 15.52,23.929 16.224,23.929 16.69,24.395 16.69,25.89 17,26.2 18.9,26.2 19.133,25.967 19.223,25.877 19.223,25.189 18.665,25.189 18.665,24.501 19.3,24.501 19.3,23.813 18.719,23.813 18.719,23.125 19.3,23.125 19.3,22.848 19.865,22.284 21.657,20.491 21.657,18.886 22.9,17.643 22.9,15.161 24.276,13.786 26.604,13.786 27.258,13.131 27.258,11.798 27.031,11.571 26.826,11.571 26.314,11.571 26.208,11.676 26.208,12.16 25.98,12.389 24.969,12.389 24.74,12.16 24.74,10.258 24.052,10.258 24.052,12.202 23.824,12.43 22.813,12.43 22.584,12.202 22.584,11.676 22.479,11.571 22.274,11.571 21.944,11.571 21.052,10.679 21.052,8.778 20.535,8.261 20.535,7.042 19.888,6.395 16.94,6.395 16.346,6.989 16.346,7.43 16.364,7.448 16.364,8.009 16.572,8.216 v1(16.572,8.324)
  BOTTOM w0.18: J3_2.9@16.44,6.395 16.385,6.45 16.385,7.734 16.364,7.754 16.364,8.009 16.572,8.216 v1(16.572,8.324)
CSI0_D0_N: J3_2.2 JMEDIA_MALE.21 | length 53.3
  TOP w0.18: JMEDIA_MALE.21@13.484,32.385 JMEDIA_MALE.21@13.819,32.385 15.315,32.385 15.755,31.945 19.934,31.945 24.04,27.839 24.04,22.636 27.359,19.317 27.359,16.482 27.527,16.314 v1(27.527,16.2)
  BOTTOM w0.18: J3_2.2@12.94,6.395 12.995,6.34 12.995,4.253 14.752,2.497 21.836,2.497 25.792,6.452 25.792,13.692 27.359,15.259 27.359,15.918 27.527,16.086 v1(27.527,16.2)
CSI0_D0_P: J3_2.3 JMEDIA_MALE.23 | length 53.2
  TOP w0.18: JMEDIA_MALE.23@13.484,31.115 JMEDIA_MALE.23@13.819,31.115 15.278,31.115 15.718,31.555 15.85,31.555 16.628,31.555 16.628,31.092 17.316,31.092 17.316,31.555 18.004,31.555 18.004,31.092 18.692,31.092 18.692,31.555 19.772,31.555 20.177,31.15 23.65,27.678 23.65,22.475 26.969,19.156 26.969,16.482 26.8,16.314 v1(26.8,16.2)
  BOTTOM w0.18: J3_2.3@13.44,6.395 13.385,6.34 13.385,4.415 14.913,2.887 21.675,2.887 25.402,6.614 25.402,13.854 26.969,15.42 26.969,15.918 26.8,16.086 v1(26.8,16.2)
CSI0_D1_N: J3_2.5 JMEDIA_MALE.27 | length 53
  TOP w0.18: JMEDIA_MALE.27@13.819,28.575 14.01,28.384 15.521,28.384 15.768,28.137 16.349,28.137 16.742,28.53 16.742,28.998 17.934,30.19 19.962,30.19 21.111,29.04 21.34,28.812 21.34,28.731 21.34,28.527 21.445,28.422 21.971,28.422 22.2,28.193 22.2,27.182 21.971,26.954 20.846,26.954 20.846,26.266 22.77,26.266 22.999,26.037 22.999,25.026 22.77,24.798 21.156,24.798 21.156,24.11 21.195,24.11 22.008,23.296 25.779,19.525 25.779,16.599 25.391,16.212 25.391,15.901 25.56,15.733 v1(25.56,15.619)
  BOTTOM w0.18: J3_2.5@14.44,6.395 14.495,6.34 14.495,4.753 15.138,4.11 22.324,4.11 24.63,6.416 24.63,14.508 25.15,15.028 25.15,15.205 25.56,15.615 v1(25.56,15.619)
CSI0_D1_P: J3_2.6 JMEDIA_MALE.29 | length 52.9
  TOP w0.18: JMEDIA_MALE.29@13.819,27.305 14.014,27.5 15.5,27.5 15.747,27.747 16.511,27.747 17.132,28.368 17.132,28.836 18.096,29.8 19.8,29.8 20.869,28.731 20.95,28.65 20.95,28.365 21.283,28.032 21.81,28.032 21.81,27.344 20.684,27.344 20.456,27.115 20.456,26.104 20.684,25.876 22.609,25.876 22.609,25.188 20.994,25.188 20.766,24.959 20.766,23.948 20.994,23.72 21.033,23.72 21.456,23.296 22.72,22.032 22.784,21.969 23.27,21.482 23.024,21.236 23.51,20.749 23.757,20.996 24.243,20.509 24.005,20.271 24.492,19.785 24.73,20.023 24.85,19.903 24.913,19.839 25.234,19.519 25.324,19.429 25.324,18.741 25.027,18.741 25.027,18.053 25.389,18.053 25.389,16.761 25.239,16.611 25.001,16.373 25.001,15.901 24.833,15.733 v1(24.833,15.619)
  BOTTOM w0.18: J3_2.6@14.94,6.395 14.885,6.34 14.885,4.915 15.3,4.5 22.162,4.5 24.24,6.577 24.24,14.669 24.545,14.974 24.545,15.331 v1(24.833,15.619)
CSI0_D2_N: J3_2.11 JMEDIA_MALE.39 | length 53.1
  TOP w0.18: JMEDIA_MALE.39@13.819,20.955 13.974,20.8 15.324,20.8 15.547,20.578 15.696,20.578 15.867,20.749 15.867,21.929 16.308,22.37 18.622,22.37 19.623,21.369 19.623,19.903 19.39,19.67 19.39,19.382 19.559,19.214 v1(19.559,19.1)
  BOTTOM w0.18: J3_2.11@17.44,6.395 17.495,6.45 17.495,8.667 17.007,9.155 16.9,9.262 16.9,9.359 16.795,9.465 15.347,9.465 15.119,9.693 15.119,10.704 15.347,10.933 17.86,10.933 17.86,11.621 15.347,11.621 15.119,11.849 15.119,12.86 15.347,13.089 17.86,13.089 17.86,13.777 15.347,13.777 15.119,14.005 15.119,15.016 15.347,15.245 17.86,15.245 17.86,15.933 15.347,15.933 15.119,16.161 15.119,17.172 15.347,17.401 17.86,17.401 17.86,18.089 17.234,18.089 16.9,18.422 16.9,18.846 16.417,19.328 16.417,21.323 17.413,22.319 19.167,22.319 19.908,21.579 19.908,19.895 19.559,19.546 v1@19.559,19.1
CSI0_D2_P: J3_2.12 JMEDIA_MALE.41 | length 53.1
  TOP w0.18: JMEDIA_MALE.41@13.819,19.685 13.953,19.819 15.488,19.819 16.257,20.587 16.257,21.767 16.469,21.98 17.247,21.98 17.247,21.593 17.935,21.593 17.935,21.98 18.46,21.98 19.233,21.208 19.233,20.064 19,19.832 19,19.382 18.832,19.214 v1(18.832,19.1)
  BOTTOM w0.18: J3_2.12@17.94,6.395 17.885,6.45 17.885,8.828 17.558,9.155 17.397,9.316 17.29,9.423 17.29,9.521 16.956,9.855 15.509,9.855 15.509,10.543 18.021,10.543 18.25,10.771 18.25,11.782 18.021,12.011 15.509,12.011 15.509,12.699 18.021,12.699 18.25,12.927 18.25,13.938 18.021,14.167 15.509,14.167 15.509,14.855 18.021,14.855 18.25,15.083 18.25,16.094 18.021,16.323 15.509,16.323 15.509,17.011 18.021,17.011 18.25,17.239 18.25,18.25 18.021,18.479 17.395,18.479 17.29,18.584 17.29,18.846 17.29,19.007 16.997,19.3 16.907,19.39 16.907,20.078 17.325,20.078 17.325,20.766 16.807,20.766 16.807,21.162 16.86,21.215 17.575,21.929 19.006,21.929 19.518,21.417 19.518,20.057 19.169,19.707 19.169,19.441 18.941,19.214 18.832,19.214 v1(18.832,19.1)